# Altium PCB GatewayLoRa.PcbDoc
Units mm, origin at the board's own origin, x right, y up, seen from the top; angles counter-clockwise.
Board outline 89.69 x 57.94 mm, 2 copper layers (Top Layer, Bottom Layer); 77 components, 47 nets, 326 pads, 40 vias.
Unrouted connection lines stored in the file: 1.
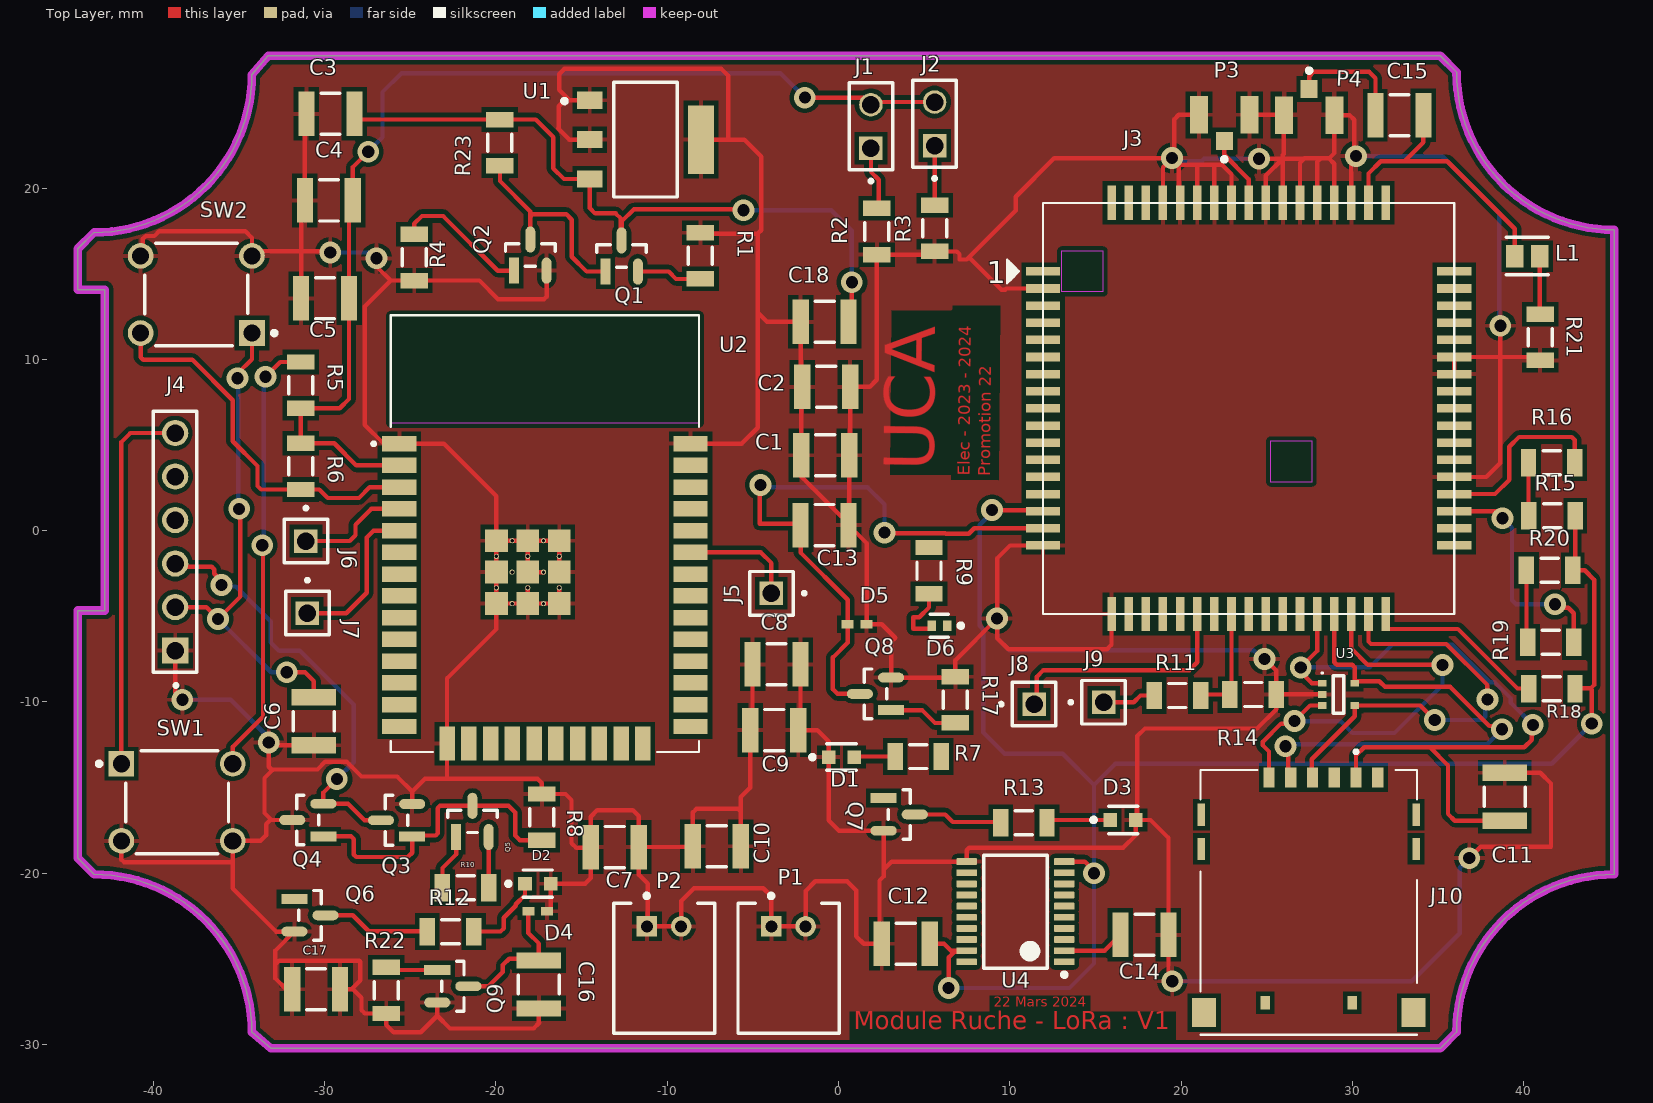
[diagram p0: Top Layer view]
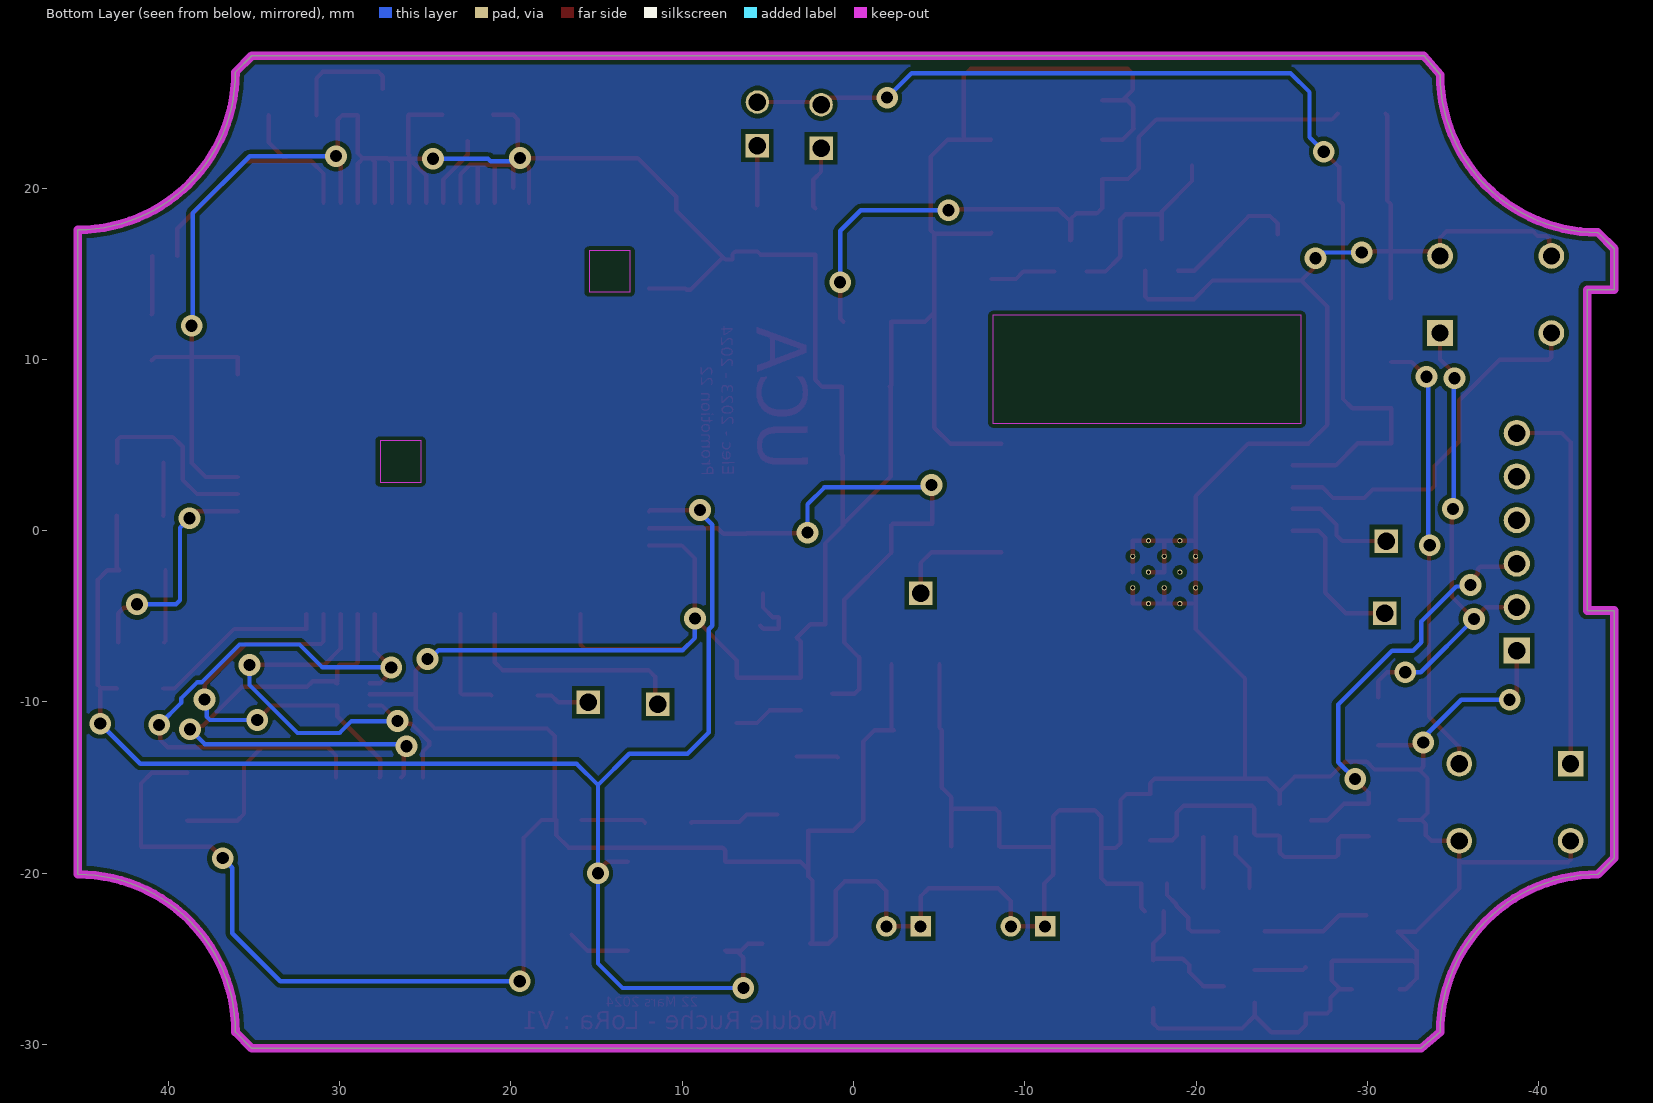
[diagram p1: Bottom Layer view, seen from below]

## Layer stack, top to bottom
Top Solder: solder mask 0.0102, Solder Resist, Dk 3.5
Top Layer: signal copper 0.0356
Dielectric 1: dielectric 0.32, FR-4, Dk 4.8
Bottom Layer: signal copper 0.0356
Bottom Solder: solder mask 0.0102, Solder Resist, Dk 3.5

## Board outline
-44.403,-19.107 -43.451,-20.06 cw(c-43.451,-29.267) -34.243,-29.267 -33.132,-30.22 35.131,-30.22 36.083,-29.267 cw(c45.291,-29.267) 45.291,-20.06 45.291,17.564 cw(c45.291,26.771) 36.083,26.771 35.131,27.724 -33.291,27.724 -34.243,26.613 cw(c-43.451,26.613) -43.451,17.405 -44.403,16.453 -44.403,14.071 -42.816,14.071 -42.816,-4.661 -44.403,-4.661

## Design rules (kind name [scope] priority, off if disabled: settings)
Clearance [All] p1: gap=0.254 ignorepadtopadclearanceinfootprint=FALSE except(0: Arc-Hole Track-Hole SMDPad-Hole THPad-Hole Via-Hole Fill-Hole Poly-Hole Region-Hole Text-Hole)
PolygonConnect [All] p1: connectstyle=Relief reliefconductorwidth=0.254 reliefentries=4 polygonreliefangle="90 Angle" airgapwidth=0.254
RoutingVias [All] p1: holewidth=0.711 width=1.27 viastyle="Through Hole" minholewidth=0.711 minwidth=1.27 maxholewidth=0.711 maxwidth=1.27
SolderMaskExpansion [All] p1: expansion=0.102 istentingtop=FALSE
Width [All] p1: maxlimit=0.254 minlimit=0.254 preferedwidth=0.254
30 further rules are at their usual default settings.

## Components (designator, comment, footprint, x,y, rotation, side; value= is the part's Value field where it differs from the comment)
C1 "100n" CAPC1210(3225)280_L -0.772,4.406 r0 top value=22uF
C2 "10u" CAPC1210(3225)280_L -0.716,8.394 r0 top value=22uF
C3 "10u" CAPC1210(3225)280_L -29.653,24.332 r0 top value=22uF
C4 "100n" CAPC1210(3225)280_L -29.742,19.276 r0 top value=22uF
C5 "10u" CAPC1210(3225)280_L -29.966,13.563 r0 top value=22uF
C6 "100n" CAPC1210(3225)280_L -30.618,-11.129 r90 top value=22uF
C7 "0.1uF" CAPC1210(3225)280_L -13.053,-18.468 r0 top value=22uF
C8 "1uF" CAPC1210(3225)280_L -3.613,-7.803 r0 top value=22uF
C9 "10uF" CAPC1210(3225)280_L -3.739,-11.64 r0 top value=22uF
C10 "100uF" CAPC1210(3225)280_L -7.095,-18.42 r0 top value=22uF
C11 "0.22uF" CAPC1210(3225)280_L 38.902,-15.528 r90 top value=22uF
C12 "0.1uF" CAPC1210(3225)280_L 3.929,-24.112 r0 top value=22uF
C13 "100uF" CAPC1210(3225)280_L -0.808,0.328 r0 top value=22uF
C14 "0.1uF" CAPC1210(3225)280_L 17.866,-23.593 r180 top value=22uF
C15 "33pF" CAPC1210(3225)280_L 32.751,24.258 r0 top value=22uF
C16 "100uF" CAPC1210(3225)280_L -17.484,-26.488 r270 top value=22uF
C17 "100n" CAPC1210(3225)280_L -30.489,-26.77 r0 top value=22uF
C18 "100n" CAPC1210(3225)280_L -0.804,12.191 r0 top value=22uF
D1 "LED_Green" FP-LTST-C191KGKT-MFG 0.182,-13.22 r0 top
D2 "LED_Bleue" FP-LTST-C193TBKT-5A-MFG -17.541,-20.608 r0 top
D3 "LED_Bleue" FP-LTST-C193TBKT-5A-MFG 16.616,-16.886 r0 top
D4 "PESD5V0X1UB" SOD523 -17.551,-22.218 r180 top
D5 "PESD5V0X1UB" SOD523 1.095,-5.461 r180 top
D6 "LED_Red" FP-SML-P11UTT86-MFG 5.894,-5.545 r180 top
J1 "TSW-102-24-L-S" SAMTEC_TSW-102-24-L-S 1.899,22.329 r90 top
J2 "TSW-102-24-L-S" SAMTEC_TSW-102-24-L-S 5.616,22.483 r90 top
J3 "SIM7000G" SIM7000G 23.946,7.137 r0 top
J4 "TSW-106-XX-X-S" SAMTEC_TSW-106-XX-X-S -38.714,-0.652 r90 top
J5 "TP1" SAMTEC_TSW-101-07-L-S -3.913,-3.655 r180 top
J6 "TP2" SAMTEC_TSW-101-07-L-S -31.083,-0.606 r270 top
J7 "TP3" SAMTEC_TSW-101-07-L-S -30.998,-4.815 r270 top
J8 "TP4" SAMTEC_TSW-101-07-L-S 11.423,-10.128 r0 top
J9 "TP5" SAMTEC_TSW-101-07-L-S 15.487,-10.014 r0 top
J10 "78646-3001" MOLEX_78646-3001 27.458,-21.701 r270 top
L1 "27nH" FP-LQM21PH_G0-IPC_C 40.212,16.031 r0 top
P1 "S2B-PH-K-S(LF)(SN)" JST-S2B-PH-K-S_V -2.91,-25.548 r0 top
P2 "S2B-PH-K-S(LF)(SN)" JST-S2B-PH-K-S_V -10.175,-25.548 r0 top
P3 "U.FL-R-SMT(01)" HRS-U.FL-R-SMT(10)_V 22.528,24.276 r90 top
P4 "U.FL-R-SMT(01)" HRS-U.FL-R-SMT(10)_V 27.48,24.258 r270 top
Q1 "BSS138" FP-318-08-IPC_B -12.657,16.036 r90 top
Q2 "BSS138" FP-318-08-IPC_B -17.983,16.088 r90 top
Q3 "BSS138" FP-318-08-IPC_B -25.791,-16.903 r180 top
Q4 "BSS138" FP-318-08-IPC_B -30.973,-16.891 r180 top
Q5 "BSS138" FP-318-08-IPC_B -21.365,-16.971 r90 top
Q6 "BSS138" FP-318-08-IPC_B -30.849,-22.453 r0 top
Q7 "BSS138" FP-318-08-IPC_B 3.548,-16.565 r0 top
Q8 "BSS138" FP-318-08-IPC_B 2.166,-9.526 r180 top
Q9 "BSS138" FP-318-08-IPC_B -22.508,-26.595 r0 top
R1 "33k" RESC3216X60X45LL10T20 -8.053,16.045 r270 top
R2 "1M" RESC3216X60X45LL10T20 2.245,17.465 r90 top
R3 "1M" RESC3216X60X45LL10T20 5.616,17.651 r90 top
R4 "100k" RESC3216X60X45LL10T20 -24.757,15.951 r90 top
R5 "100k" RESC3216X60X45LL10T20 -31.383,8.495 r270 top
R6 "10k" RESC3216X60X45LL10T20 -31.383,3.752 r90 top
R7 "100" RESC3216X60X45LL10T20 4.66,-13.185 r180 top
R8 "33k" RESC3216X60X45LL10T20 -17.308,-16.72 r270 top
R9 "150" RESC3216X60X45LL10T20 5.29,-2.334 r270 top
R10 "100k" RESC3216X60X45LL10T20 -21.764,-20.85 r180 top
R11 "NC" RESC3216X60X45LL10T20 19.791,-9.622 r0 top
R12 "470" RESC3216X60X45LL10T20 -22.643,-23.401 r0 top
R13 "470" RESC3216X60X45LL10T20 10.826,-17.041 r0 top
R14 "NC" RESC3216X60X45LL10T20 24.205,-9.565 r180 top
R15 "2.2k" RESC3216X60X45LL10T20 41.66,0.882 r0 top
R16 "NC" RESC3216X60X45LL10T20 41.633,3.965 r180 top
R17 "33k" RESC3216X60X45LL10T20 6.83,-9.873 r270 top
R18 "NC" RESC3216X60X45LL10T20 41.582,-6.511 r180 top
R19 "33k" RESC3216X60X45LL10T20 41.649,-9.216 r0 top
R20 "2.2k" RESC3216X60X45LL10T20 41.515,-2.312 r180 top
R21 "10" RESC3216X60X45LL10T20 40.962,11.292 r270 top
R22 "33k" RESC3216X60X45LL10T20 -26.393,-26.837 r90 top
R23 "33k" RESC3216X60X45LL10T20 -19.757,22.649 r270 top
SW1 "B3F-1000" OMRON-B3F-1000-4_V -38.605,-15.855 r0 top
SW2 "B3F-1000" OMRON-B3F-1000-4_V -37.482,13.786 r180 top
U1 "MIC5239-3.3YS-TR" FP-SOT223-3LD-PL-1-MFG -11.266,22.829 r0 top
U2 "ESP32-WROOM-32D" MODULE_ESP32-WROOM-32D -17.13,-0.179 r0 top
U3 "MSQA6V1W5T2G" ONSC-SC70-5-419A-02_V 29.196,-9.556 r0 top
U4 "TXB0108PWR" PW0020A_L 10.335,-22.243 r180 top

## Footprints (in the part's own frame and the unit in brackets; to place one, negate y for a bottom-side part, rotate by r counter-clockwise, add the part's x,y. Pads: shape width x height; smd on the part's side, far side on the other; paste and mask are expansions set on the pad)
CAPC1210(3225)280_L [mm] "Chip Capacitor, Body 3.2x2.5mm, Height 2.8mm, IPC High Density"
  rect 0.95x2.6 smd: 1(-1.4,0) 2(1.4,0)
  silkscreen extent -0.55,-1.2 0.55,1.2, body extent -1.7,-1.4 1.7,1.4, height 2.8
FP-318-08-IPC_B [mm]
  rect 1.524x0.578 smd paste+0 mask+0: 1(-0.91,0.95)
  rrect100% 1.524x0.578 smd paste+0 mask+0: 2(-0.91,-0.95) 3(0.91,0)
  silkscreen extent -0.65,-1.45 0.65,1.45, body extent -1.92,-1.7 1.92,1.7, height 0.25
FP-LQM21PH_G0-IPC_C [mm]
  rect 1.006x1.308 smd paste+0 mask+0: 1(-0.726,0) 2(0.726,0)
  silkscreen extent -1.23,-1.1 1.23,1.1, body extent -1.33,-0.8 1.33,0.8, height 0.25
FP-LTST-C191KGKT-MFG [mm]
  rect 0.8x0.8 smd paste+0 mask+0: 1(-0.75,0) 2(0.75,0)
  silkscreen extent -1.82,-0.77 0.85,0.77, body extent -1.25,-0.55 1.25,0.55, height 0.25
FP-LTST-C193TBKT-5A-MFG [mm]
  rect 0.8x0.8 smd paste+0 mask+0: 1(-0.75,0) 2(0.75,0)
  silkscreen extent -1.85,-0.8 0.85,0.8, body extent -1.25,-0.55 1.25,0.55, height 0.25
FP-SML-P11UTT86-MFG [mm]
  rect 0.5x0.6 smd paste+0 mask+0: 1(-0.45,0) 2(0.45,0)
  silkscreen extent -1.38,-0.67 0.53,0.67, body extent -0.8,-0.43 0.8,0.43, height 0.25
FP-SOT223-3LD-PL-1-MFG [mm]
  rect 1.5x1 smd paste+0 mask+0: 1(-3.25,2.3) 2(-3.25,0) 3(-3.25,-2.3)
  rect 1.5x4 smd paste+0 mask+0: 4(3.25,0)
  silkscreen extent -4.85,-3.35 1.85,3.35, body extent -4.1,-3.45 4.1,3.45, height 0.25
HRS-U.FL-R-SMT(10)_V [mm] "Connector, 3-Leads, Body 2.6x2.6mm"
  rect 1.05x1 smd: 1(-1.525,0)
  rect 2.2x1.05 smd: 2(0,-1.475) 3(0,1.475)
  silkscreen extent -2.72,-0.13 -2.48,0.12, body extent -1.3,-1.3 1.3,1.3, height 1.25
JST-S2B-PH-K-S_V [mm] "THD, 2-Leads, Body 7.6x5.9mm, Pitch 2mm"
  rect 1.2x1.2 hole 0.7: 1(-1,2.45)
  round 1.2 hole 0.7: 2(1,2.45)
  silkscreen extent -2.95,-3.8 2.95,4.35, body extent -2.95,-3.8 2.95,3.8, height 4.8
MODULE_ESP32-WROOM-32D [mm]
  rect 2x0.9 smd: 1(-8.5,5.26) 2(-8.5,3.99) 3(-8.5,2.72) 4(-8.5,1.45) 5(-8.5,0.18) 6(-8.5,-1.09) 7(-8.5,-2.36) 8(-8.5,-3.63) 9(-8.5,-4.9) 10(-8.5,-6.17) 11(-8.5,-7.44) 12(-8.5,-8.71) 13(-8.5,-9.98) 14(-8.5,-11.25) 25(8.5,-11.25) 26(8.5,-9.98) 27(8.5,-8.71) 28(8.5,-7.44) 29(8.5,-6.17) 30(8.5,-4.9) 31(8.5,-3.63) 32(8.5,-2.36) 33(8.5,-1.09) 34(8.5,0.18) 35(8.5,1.45) 36(8.5,2.72) 37(8.5,3.99) 38(8.5,5.26)
  rect 0.9x2 smd: 15(-5.715,-12.25) 16(-4.445,-12.25) 17(-3.175,-12.25) 18(-1.905,-12.25) 19(-0.635,-12.25) 20(0.635,-12.25) 21(1.905,-12.25) 22(3.175,-12.25) 23(4.445,-12.25) 24(5.715,-12.25)
  rect 1.33x1.33 smd: 39_1(-2.835,-0.405) 39_2(-1,-0.405) 39_3(0.835,-0.405) 39_4(-2.835,-2.24) 39_5(-1,-2.24) 39_6(0.835,-2.24) 39_7(-2.835,-4.075) 39_8(-1,-4.075) 39_9(0.835,-4.075)
  round 0.3 hole 0.2: 39_10(-1.917,-0.405) 39_11(-0.082,-0.405) 39_12(-2.835,-1.322) 39_13(-1,-1.322) 39_14(0.835,-1.322) 39_15(-1.917,-2.24) 39_16(-0.082,-2.24) 39_17(-2.835,-3.157) 39_18(-1,-3.157) 39_19(0.835,-3.157) 39_20(-1.917,-4.075) 39_21(-0.082,-4.075)
  Keep-Out Layer region: 9,6.45 -9,6.45 -9,12.75 9,12.75
  silkscreen extent -10.1,-12.75 9,12.75, body extent -9,-12.75 9,12.75, height 3.25
MOLEX_78646-3001 [mm]
  rect 1.15x0.65 smd: C1(-7.295,2.755) C2(-7.295,0.215) C3(-7.295,-2.325) C5(-7.295,4.025) C6(-7.295,1.485) C7(-7.295,-1.055)
  rect 1.3x0.45 smd: G1(-5.125,6.27) G2(-3.125,6.27) G3(-5.125,-6.27) G4(-3.125,-6.27)
  rect 1.7x1.4 smd: G5(6.435,-6.105) G6(6.435,6.105)
  rect 0.8x0.54 smd: X1(5.855,2.54) X2(5.855,-2.54)
  silkscreen extent -8.89,-6.32 7.73,6.32
OMRON-B3F-1000-4_V [mm] "TH, 4-Leads, Body 6x6mm"
  rect 1.5x1.5 hole 1 paste+0: 1(-3.25,2.25)
  round 1.5 hole 1 paste+0: 2(3.25,2.25) 4(3.25,-2.25)
  round 1.5 hole 1 paste+0 mask+0.102: 3(-3.25,-2.25)
  silkscreen extent -4.67,-3 3,3, body extent -3,-3 3,3, height 4.5
ONSC-SC70-5-419A-02_V [mm] "SOT23, 5-Leads, Body 2x1.25mm, Pitch 0.65mm"
  rect 0.5x0.4 smd: 1(-0.95,0.65) 2(-0.95,0) 3(-0.95,-0.65) 4(0.95,-0.65) 5(0.95,0.65)
  silkscreen extent -1,-1.1 0.3,1.3, body extent -0.63,-1 0.63,1, height 1.1
PW0020A_L [mm] "SOP, 20-Leads, Body 6.6x4.5mm, Pitch 0.65mm, IPC High Density"
  rrect25% 1.2x0.4 smd: 1(-2.85,2.925) 2(-2.85,2.275) 3(-2.85,1.625) 4(-2.85,0.975) 5(-2.85,0.325) 6(-2.85,-0.325) 7(-2.85,-0.975) 8(-2.85,-1.625) 9(-2.85,-2.275) 10(-2.85,-2.925) 11(2.85,-2.925) 12(2.85,-2.275) 13(2.85,-1.625) 14(2.85,-0.975) 15(2.85,-0.325) 16(2.85,0.325) 17(2.85,0.975) 18(2.85,1.625) 19(2.85,2.275) 20(2.85,2.925)
  silkscreen extent -2.98,-3.3 1.85,3.8, body extent -3.21,-3.25 3.21,3.25, height 1
RESC3216X60X45LL10T20 [mm] "Chip Resistor, 2-Leads, Body 3.20x1.60mm, IPC High Density"
  rect 0.9x1.6 smd: 1(-1.35,0) 2(1.35,0)
  silkscreen extent -0.5,-0.7 0.5,0.7, body extent -1.65,-0.85 1.65,0.85, height 0.6
SAMTEC_TSW-101-07-L-S [mm]
  rect 1.37x1.37 / inner round 1.37 / far side rect 1.37x1.37 hole 1.02: 01(0,0)
  silkscreen extent -2.02,-1.27 1.27,1.27
SAMTEC_TSW-102-24-L-S [mm]
  rect 1.37x1.37 hole 1.02: 01(0,0)
  round 1.37 hole 1.02: 02(2.54,0)
  silkscreen extent -2.02,-1.27 3.81,1.27
SAMTEC_TSW-106-XX-X-S [mm]
  rect 1.53x1.53 hole 1.02: 01(-6.35,0)
  round 1.53 hole 1.02: 02(-3.81,0) 03(-1.27,0) 04(1.27,0) 05(3.81,0) 06(6.35,0)
  silkscreen extent -8.48,-1.27 7.62,1.27
SIM7000G [mm]
  rect 2x0.5 smd: P$1(-12,8) P$2(-12,7) P$3(-12,6) P$4(-12,5) P$5(-12,4) P$6(-12,3) P$7(-12,2) P$8(-12,1) P$9(-12,0) P$10(-12,-1) P$11(-12,-2) P$12(-12,-3) P$13(-12,-4) P$14(-12,-5) P$15(-12,-6) P$16(-12,-7) P$17(-12,-8) P$35(12,-8) P$36(12,-7) P$37(12,-6) P$38(12,-5) P$39(12,-4) P$40(12,-3) P$41(12,-2) P$42(12,-1) P$43(12,0) P$44(12,1) P$45(12,2) P$46(12,3) P$47(12,4) P$48(12,5) P$49(12,6) P$50(12,7) P$51(12,8)
  rect 0.5x2 smd: P$18(-8,-12) P$19(-7,-12) P$20(-6,-12) P$21(-5,-12) P$22(-4,-12) P$23(-3,-12) P$24(-2,-12) P$25(-1,-12) P$26(0,-12) P$27(1,-12) P$28(2,-12) P$29(3,-12) P$30(4,-12) P$31(5,-12) P$32(6,-12) P$33(7,-12) P$34(8,-12) P$52(8,12) P$53(7,12) P$54(6,12) P$55(5,12) P$56(4,12) P$57(3,12) P$58(2,12) P$59(1,12) P$60(0,12) P$61(-1,12) P$62(-2,12) P$63(-3,12) P$64(-4,12) P$65(-5,12) P$66(-6,12) P$67(-7,12) P$68(-8,12)
  Keep-Out Layer region: -8.5,6.8 -10.9,6.8 -10.9,9.2 -8.5,9.2
  Keep-Out Layer region: 3.7,-4.3 1.3,-4.3 1.3,-1.9 3.7,-1.9
  silkscreen extent -14.1,-12 12,12
SOD523 [mm]
  rect 0.7x0.5 smd: 1(0.55,0) 2(-0.55,0)

## Part data
C1 C2 C3 C4 C5 C6 C7 C8 C9 C10 C11 C12 C13 C14 C15 C16 C17 C18: library part CMP-1038-02268-1, "CAP 22uF 10V ±10% 1210 (3225 Metric) Thickness 2.8mm SMD", Case-EIA=1210, Case-Metric=3225, Rated Voltage="10 V", Tolerance=Â±10%, Max Thickness="2.8 mm", Technology=SMT
D1: library part CMP-2000-05198-2, "LED GREEN CLEAR SMD", Case Code (Imperial)=0603, Case Code (Metric)=1608, Color=Green, Forward Current=30mA, Forward Voltage=2V, Lens Color=Colorless, Max Operating Temperature=85°C, Max Power Dissipation=75mW, Min Operating Temperature=-55°C, Package Quantity=1, Reverse Voltage=5V, Test Current=20mA, Case/Package=0603, Depth=0.8mm, Dominant Wavelength=571nm, Height=0.55mm, Illumination Color=Green, Lead Free="Lead Free", Length=1.6mm, Lens Style=Rectangular, Lens Transparency=Clear, Luminous Intensity=35mcd, Mount="Surface Mount", Number of Elements=1, Number of LEDs=1, Number of Pins=2, Packaging="Tape and Reel", Power Dissipation=75mW, Power Rating=75mW, Radiation Hardening=No, Viewing Angle=130°, Wavelength=574nm, Width=0.8mm
D2 D3: library part CMP-2000-06624-2, "LED BLUE CLEAR CHIP SMD", Case Code (Imperial)=0603, Case Code (Metric)=1608, Color=Blue, Forward Current=20mA, Forward Voltage=2.8V, Lens Color=Colorless, Max Operating Temperature=80°C, Min Operating Temperature=-20°C, Package Quantity=1, Power Dissipation=76mW, Reverse Voltage=5V, Test Current=5mA, Case/Package=0603, Depth=0.8mm, Dominant Wavelength=475nm, Height=0.35mm, Illumination Color=Blue, Lead Free="Lead Free", Length=1.6mm, Lens Style=Diffused, Lens Transparency=Clear, Luminous Intensity=15mcd, Mount="Surface Mount", Number of Elements=1, Number of LEDs=1, Number of Pins=2, Packaging="Tape and Reel", Radiation Hardening=No, RoHS Compliant=Yes, Viewing Angle=130°, Width=0.8mm
D4 D5: "8V _Typ_ Clamp 1.5A _8/20Âµs_ Ipp Tvs Diode Surface Mount SOD-523", Package="SOD-523 NXP Semiconductors", Availability=Unavailable, MF="NXP Semiconductors", MP=PESD5V0X1UB, Price=None, SnapEDA_Link=https://www.snapeda.com/parts/PESD5V0X1UB/NXP%20Semiconductors/view-part/4219816/?ref=snap
D6: library part CMP-08952-000028-1, "LED RED CLEAR 1006 SMD", Case Code (Imperial)=0402, Case Code (Metric)=1005, Color=Red, Forward Current=20mA, Forward Voltage=1.8V, Lens Color=Colorless, Max Operating Temperature=85°C, Min Operating Temperature=-40°C, Package Quantity=1, Test Current=1mA, Case/Package=0402, Dominant Wavelength=621nm, Height=0.25mm, Illumination Color=Red, Lead Free="Lead Free", Length=1mm, Lens Style=Square, Lens Transparency=Clear, Luminous Intensity=5.5mcd, Mount="Surface Mount", Number of LEDs=1, Number of Pins=2, Packaging="Tape and Reel", Radiation Hardening=No, REACH SVHC="No SVHC", RoHS Compliant=Yes, Series=PicoLED™, Viewing Angle=150°, Wavelength=621nm, Width=0.6mm
J1 J2: "Connector Header Through Hole 2 position 0.100 (2.54mm)", Package=None, Availability=Bad, MF=Samtec, MP=TSW-102-24-L-S, Price=None, SnapEDA_Link=https://www.snapeda.com/parts/TSW-102-24-L-S/Samtec%20Inc./view-part/930762/?ref=snap, Toby_UK-Purchase-URL=https://snapeda.com/shop?store=Toby+UK&id=930762
J3: "802.15.4 Cat-M, Cat-NB, EDGE, GPRS, LPWA Transceiver Module 850MHz, 900MHz, 1.8GHz, 1.9GHz Antenna Not Included Surface Mount", Package=None, Availability="In Stock", Check_prices=https://www.snapeda.com/parts/SIM7000G/SIMCom/view-part/?ref=eda, MF="SIMCom Wireless Solutions Limited", MP=SIM7000G, Price=None, Purchase-URL=https://pricing.snapeda.com/search?q=SIM7000G&ref=eda, SnapEDA_Link=https://www.snapeda.com/parts/SIM7000G/SIMCom/view-part/?ref=snap
J4: "TSW - Samtec 2.54mm Pin Header 10.92mm Overall Pin Length (07) - Fast Stock", Package=None, Availability=Unavailable, MF="Samtec Inc.", MP=TSW-106-XX-X-S, Price=None
J5 J6 J7 J8 J9: library part TSW-101-07-L-S, "<a href=\"https://pricing.snapeda.com/parts/TSW-101-07-L-S/Samtec/view-part?ref=eda\">Check availability</a>", Package=None, Availability=Unavailable, MF="Samtec Inc.", MP=TSW-101-07-L-S, Price=None
J10: "6 Position Card Connector Micro SIM Surface Mount, Right Angle Gold", Package=None, Availability="In Stock", Check_prices=https://www.snapeda.com/parts/78646-3001/Molex/view-part/?ref=eda, MF=Molex, MP=78646-3001, Price=None, SnapEDA_Link=https://www.snapeda.com/parts/78646-3001/Molex/view-part/?ref=snap
L1: library part CMP-06042-017027-1, "Multilayer Type Inductor for Power Lines, 0805 (2012), 1μH, 30%, 0.0825Ω, 1.3A", Case Code (Imperial)=0805, Case Code (Metric)=2012, Current Rating=1.3A, DC Resistance (DCR)=82.5mR, Inductance=1uH, Inductance Tolerance=30%, Max Operating Temperature=125°C, Min Operating Temperature=-55°C, Package Quantity=4000, Self Resonant Frequency=50MHz, Test Frequency=1MHz, Case/Package=0805, Core Material=Ferrite, DC Current=1.3A, Depth=1.4mm, Height=0.9mm, Height - Seated (Max)=0.039inch, Length=2mm, Max DC Current=1.3A, Military Standard=Not, Mount="Surface Mount", Packaging="Tape and Reel", REACH SVHC="No SVHC", RoHS Compliant=Yes, Series=LQM21PN_GR, Shielding=Shielded, Termination=SMD/SMT, Tolerance=30%, Weight=0.000194oz, Width=0.049inch
P1 P2: library part CMP-1755-00004-1, "Male Header, Pitch 2 mm, 1 x 2 Position, Height 4.8 mm, Tail Length 3.4 mm, -25 to 85 degC, RoHS, Bulk", Capacitance="10 uF", Case\Package=Radial, Max Operating Temperature="85 degC", Min Operating Temperature="-40 degC", Package Quantity=200, Tolerance=20%, Voltage Rating="50 V", ComponentLink1Description=Datasheet, ComponentLink1URL=http://www.jst-mfg.com/product/pdf/eng/ePH.pdf, DatasheetVersion=Dec-12, Diameter="5 mm", Height="11 mm", Lead Pitch="2 mm", Length="11 mm", Mount="Through Hole", PackageDescription="Male Header, Pitch 2 mm, 1 x 2 Position, Height 4.8 mm, Tail Length 3.4 mm", PackageReference=S2B-PH-K-S, Packaging=Bulk, Pins=2, Radiation Hardening=No, REACH SVHC="No SVHC", RoHSCompliant=true, Voltage Rating (DC)="50 V"
P3 P4: library part CMP-2000-05151-1, "CONN RECPT ULTRA-MINI COAX SMD", Centre Contact Resistance=25mohm, Contact Resistance=10mohm, Flammability Rating=UL94V-0, Frequency Max=6GHz, Insulation Resistance=500Mohm, Manufacturer="Hirose Electric", Operating Temperature Max=90degC, Operating Temperature Min=-40degC, Package Description="3-Pin Surface Mount Device, Body 2.6 x 2.6 mm", Package Reference=U.FL-R-SMT(10), Voltage Rating V AC=60V, Approval Category=UL94V-0, Body Plating=Silver, Body Style=StraightJack, Coaxial Termination=Solder, Connector Mounting=PCB, Connector Mounting Orientation=PCBoard, Connector Type=UFLCoaxial, Contact Material=PhosphorBronze, Contact Plating=Gold, Datasheet URL=http://www.farnell.com/datasheets/91524.pdf, Datasheet Version=Feb-04, External Length / Height=2.5mm, Female Contact Material=PhosphorBronze, Female Contact Plating=Gold, Impedance=50ohm, Jacket Material=LCP, Male Contact Material=Brass, Male Contact Plating=Gold, Manufacturer URL=https://www.hirose.com, Material=PhosphorBronze, Mounting Type=PCBoard, Operating Frequency Max=6GHz, Outer Contact Resistance=10mohm, Secondary Insulation Material=PBT, SVHC=NoSVHC(18-Jun-2012), Termination Method=Solder, VSWR=1.3
Q1 Q2 Q3 Q4 Q5 Q6 Q7 Q8 Q9: library part CMP-07173-000101-1, "MOSFET N-CH 50V 220MA SOT-23", Case/Package=SOT-23, Continuous Drain Current (ID)=220mA, Drain to Source Breakdown Voltage=50V, Drain to Source Resistance=3.5R, Gate to Source Voltage (Vgs)=20V, Input Capacitance=27pF, Max Operating Temperature=150°C, Max Power Dissipation=360mW, Min Operating Temperature=-55°C, On-State Resistance=6R, Package Quantity=1, Threshold Voltage=1.3V, Contact Plating=Tin, Current Rating=220mA, Drain to Source Voltage (Vdss)=50V, Dual Supply Voltage=50V, Element Configuration=Single, Fall Time=9ns, Height=0.93mm, Lead Free="Lead Free", Length=2.92mm, Mount="Surface Mount", Nominal Vgs=1.3V, Number of Elements=1, Number of Pins=3, Packaging="Tape and Reel", Power Dissipation=360mW, Radiation Hardening=No, Rds On Max=3.5R, REACH SVHC="No SVHC", Rise Time=9ns, Termination=SMD/SMT, Turn-Off Delay Time=20ns, Turn-On Delay Time=2.5ns, Voltage Rating (DC)=50V, Weight=0.03g, Width=1.3mm
R1 R2 R3 R4 R5 R6 R7 R8 R9 R10 R11 R12 R13 R14 R15 R16 R17 R18 R19 R20 R21 R22 R23: library part CMP-2003-02263-1, Manufacturer="Vishay Dale", Part Number=CRCW120651R0FKEA
SW1 SW2: library part CMP-1677-00002-1, "Tactile Switch, SPST-NO, 0.05 A, 5 to 24 V, -25 to 70 degC, 4-Pin THD, RoHS, Bulk", Capacitance="-45 f", Current Rating="1.5 A", Max Operating Temperature="70 degC", Min Operating Temperature="-40 degC", Package Quantity=1080, Voltage Rating="150 V", ComponentLink1Description="Manufacturer URL", ComponentLink1URL=http://www.omron.com/, ComponentLink2Description=Datasheet, ComponentLink2URL=http://www.omron.com/ecb/products/pdf/en-b3f.pdf, Contact Material=Brass, Contact Plating=Gold, DatasheetVersion=Jan-15, Gender=Female, Height="14.99 mm", Lead Pitch="1.27 mm", Length="18.34 mm", Mount="Through Hole", PackageDescription="4-Pin Through Hole Device, Body 6 x 6 mm", PackageReference=B3F-1000, Packaging=Tray, Pins=8, Radiation Hardening=No, RoHSCompliant=true, Shielding=Shielded, Width="25.4 mm"
U1: library part CMP-06324-000012-1, "IC REG LINEAR 3.3V 500MA SOT223", Dropout Voltage=350mV, Manufacturer=Microchip, Max Junction Temp=+125°C, Max Supply Voltage=30V, Nominal Supply Current=23-8500uA, Output Current=500mA, Output Voltage=3.3V, Package=SOT223-3LD-PL-1, Temperature="-40°C to +125°C", Temperature Range Low=-40°C, Accuracy Percentage=1%, Automotive=No, Category=IC, ComponentLink2Description=Datasheet, ComponentLink2URL=http://ww1.microchip.com/downloads/en/DeviceDoc/mic5239.pdf, Device Class L1="Integrated Circuits (ICs)", Device Class L2="Power Management ICs", Device Class L3="Voltage Regulators - Linear", Digikey Description="IC REG LINEAR 3.3V 500MA SOT223", Footprint Url=https://ww1.microchip.com/downloads/en/PackagingSpec/00000049CE.pdf, Height=1.8mm, Ipc Land Pattern Name=SOT230P700X180-4, Lead Free=Yes, Manufacturer Part Number=MIC5239-3.3YS-TR, Mouser Description="LDO Voltage Regulators High Vin, Low Iq Regulator (Lead Free)", Number Of Outputs=1, Octopart=https://octopart.com/mic5239-3.3ys-tr-microchip-66802369, Output Type=Fixed, RoHS=TRUE, Standoff Height=0.02mm, Temperature Range High=+125°C
U2: "Bluetooth, WiFi 802.11b/g/n, Bluetooth v4.2 +EDR, Class 1, 2 and 3 Transceiver Module 2.4GHz ~ 2.5GHz Integrated", Package="Module Espressif Systems", Availability="In Stock", Check_prices=https://www.snapeda.com/parts/ESP32-WROOM-32D/Espressif+Systems/view-part/?ref=eda, MF="Espressif Systems", MP=ESP32-WROOM-32D, Price=None, Purchase-URL=https://pricing.snapeda.com/search/part/ESP32-WROOM-32D/?ref=eda, SnapEDA_Link=https://www.snapeda.com/parts/ESP32-WROOM-32D/Espressif+Systems/view-part/?ref=snap
U3: library part CMP-1063-00034-1, "Quad Array ESD Protection Diodes with Low Clamping Voltage, 5-Pin SC70, Pb-Free, Tape and Reel", Manufacturer="On Semiconductor", C Max (pF)=90, ComponentLink1Description="Manufacturer URL", ComponentLink1URL=http://www.onsemi.com/, ComponentLink2Description=Datasheet, ComponentLink2URL=http://www.onsemi.cn/pub_link/Collateral/MSQA6V1W5T2-D.PDF, ComponentLink3Description="Package Specification", ComponentLink3URL=http://www.onsemi.cn/pub_link/Collateral/419A-02.PDF, DatasheetVersion="Rev. 7", Direction=Unidirectional, IR Max (uA)=1, Mounting Technology="Surface Mount", Number of Lines=4, PackageDescription="5-Pin Small Outline Transistor, Body 2 x 1.25 mm, Pitch 0.65 mm", PackageReference=SC70-5-419A-02, PackageVersion="Rev. L, 01/2013", Packing="Tape and Reel", PartNumber=MSQA6V1W5T2G, PPK Max (W)=150, RoHS=Pb-Free, V(BR) Min (V)=6.1
U4: library part CMP-2000-07337-1, "TXB0108 8-Bit Bidirectional Voltage-Level Translator with Auto-Direction Sensing and / +/- 15-kV ESD Protection, 1.2 to 3.6 V, -40 to 85 degC, 20-Pin TSSOP (PW), Green (RoHS & no Sb/Br), Tape and Reel", Manufacturer="Texas Instruments", Operating Temperature=-40°C~85°C, Package / Case="20-TSSOP(0.173\",4.40mmWidth)", Package Description="20-Pin Small Outline Package Integrated Circuit, Body 6.5 x 4.4 mm, Pitch 0.65 mm", Package Reference=PW20, Package Version="4040064-5/G, 02/2011", Standard Package=1, Supplier Device Package=20-TSSOP, Voltage - Supply=1.2V~3.6V,1.65V~5.5V, Category=IntegratedCircuits(ICs), Data Rate=100Mbps, Datasheet URL=http://www.ti.com/general/docs/lit/getliterature.tsp?genericPartNumber=TXB0108&fileType=pdf, Datasheet Version="Rev. F, 12/2014", Differential - Input=Output:No/No, Dynamic Catalog=TXBSeries, Family=Logic-Translators, Input Type=Logic, Logic Function=Translator,Bidirectional, Manufacturer URL=http://www.ti.com/, Mounting Technology=SurfaceMount, Number of Bits=8, Number of Channels=8, Number of Outputs/Channel=1, Other Names=296-21527-6, Output Type=Logic, Package URL=http://www.ti.com/litv/pdf/mpds362, Packaging=Digi-Reel®, Product Training Modules=VoltageLevelTranslation, Propagation Delay (Max)=4ns, Series=-

## Via types
v1: diameter 1.27, hole 0.711, Top Layer to Bottom Layer, 40 vias

## Nets (pads, with @x,y where several pads share a name; then routed paths per layer and width w, separated by ;. In a path a pad name is that pad's centre, name@x,y a point inside that pad or via, vN(x,y) a via of type N, cw(c..) or ccw(c..) an arc to the next point about the centre after c; other vN are vias at no path point)
+1V8: C12.2 J3.P$15 R15.2 R19.2 R20.1 U4.10 U4.19 | length 96.3
  Top Layer w0.254: C12.2 6.165,-24.112 6.571,-24.518 U4.19 7.416,-24.587 6.757,-24.587 6.436,-24.908 v1(6.436,-26.698) ; v1(8.967,1.201) 11.882,1.201 J3.P$15 ; U4.10 14.376,-19.318 v1@14.783,-19.725 ; R15.2 43.01,-2.168 R20.1 43.564,-2.312 44.114,-2.862 44.114,-9.01 43.907,-9.216 43.901,-9.216 ; v1(43.982,-11.265) 43.982,-9.298 43.901,-9.216 ; 43.901,-9.216 43.892,-9.207 43.008,-9.207 R19.2 43.901,-9.216
  Bottom Layer w0.254: v1(6.436,-26.698) 13.493,-26.698 14.921,-25.27 v1(14.921,-20) 14.921,-14.85 ; v1(8.967,1.201) 8.967,1.061 8.25,0.343 8.25,-5.55 8.451,-5.751 8.451,-7.973 8.451,-11.781 9.695,-13.026 13.097,-13.026 14.921,-14.85 ; v1(43.982,-11.265) 41.648,-13.6 16.171,-13.6 14.921,-14.85
+3V3: C4.2 C5.2 J1.02 J2.02 R5.2 R6.2 U2.2 | length 63.6
  Top Layer w0.254: v1(-27.45,22.121) -28.342,21.23 C4.2 -28.566,19.051 C5.2 -28.566,7.687 -29.109,7.145 R5.2 R6.2 -29.435,5.102 -28.144,3.811 U2.2 ; v1(-1.958,25.279) 1.489,25.279 J1.02 2.053,25.023 J2.02
  Bottom Layer w0.254: v1(-27.45,22.121) -26.609,22.963 -26.609,25.603 -25.503,26.709 -3.388,26.709 v1(-1.958,25.279)
+5V: C14.2 U4.2 | length 3.7
  Top Layer w0.254: U4.2 15.54,-24.518 C14.2
GND: C1.1 C1.2 C2.1 C2.2 C3.1 C4.1 C5.1 C6.1 C7.1 C7.2 C8.1 C8.2 C9.1 C9.2 C10.1 C10.2 C11.2 C12.1 C13.2 C14.1 C16.2 C17.1 C17.2 C18.1 D1.1 D2.2 D3.2 D4.2 D5.2 J3.P$2 J3.P$17 J3.P$18 J3.P$39 J3.P$45 J3.P$46 J3.P$54 J3.P$55 J3.P$56 J3.P$57 J3.P$58 J3.P$59 J3.P$61 J3.P$62 J3.P$63 J3.P$64 J3.P$65 J4.01 P1.1 P1.2 P2.1 P2.2 P3.2 P3.3 P4.2 P4.3 Q2.2 Q3.2 Q4.3 Q6.2 Q7.2 Q8.2 Q9.2 R1.1 R2.1 R3.1 R4.1 R8.1 R14.1 R17.1 R21.2 R22.1 SW1.3 SW1.4 SW2.3 SW2.4 U1.1 U1.2 U1.4 U2.1 U2.15 U2.38 U2.39_1 U2.39_2 U2.39_3 U2.39_4 U2.39_5 U2.39_6 U2.39_7 U2.39_8 U2.39_9 U2.39_10 U2.39_11 U2.39_12 U2.39_13 U2.39_14 U2.39_15 U2.39_16 U2.39_17 U2.39_18 U2.39_19 U2.39_20 U2.39_21 U3.2 U4.11 | length 586.6
  Top Layer w0.254: SW1.3 -41.855,-19.2 -41.706,-19.349 -35.355,-19.349 ; SW2.4 -40.6,16.168 -40.6,17.037 -40.44,17.198 -39.929,17.198 -39.641,17.486 -34.626,17.486 -34.232,17.093 SW2.3 -33.961,16.307 -31.366,16.307 ; J4.01 -38.714,-9.451 v1(-38.297,-9.867) ; -33.049,-13.99 -33.257,-13.782 v1(-33.257,-12.36) -33.088,-12.529 C6.1 ; C17.1 -32.234,-26.77 -32.864,-26.14 -32.864,-25.324 ; Q4.3 -33.091,-16.891 ; C5.1 -31.366,16.307 ; C3.1 -31.142,24.242 C4.1 -31.366,19.051 -31.366,16.307 ; v1(-29.661,16.236) -29.732,16.307 -31.366,16.307 ; C17.2 -28.429,-26.77 ; v1(-26.959,15.898) -26.959,15.425 -26.135,14.601 ; Q3.2 -24.881,-15.228 ; Q9.2 -23.418,-28.313 ; U2.39_18 U2.39_8 ; C16.2 -17.484,-28.708 -17.462,-28.73 -17.793,-29.061 -22.67,-29.061 -23.418,-28.313 ; U2.39_16 U2.39_5 U2.39_13 U2.39_2 ; Q2.2 -17.033,13.663 -17.182,13.514 -19.869,13.514 -20.956,14.601 R4.1 -26.135,14.601 ; D4.2 -16.791,-22.008 D2.2 -14.788,-20.608 -14.453,-20.273 C7.1 ; U2.39_19 U2.39_9 U2.39_21 U2.39_8 ; U2.39_6 U2.39_14 U2.39_3 U2.39_11 U2.39_2 ; U1.2 -15.708,22.829 -16.365,23.486 -16.322,23.528 -16.322,24.781 -15.975,25.129 -15.69,25.129 ; U1.1 -15.69,25.129 ; U2.38 -5.638,5.081 -4.705,6.014 -4.705,12.732 ; R1.1 -7.999,17.342 -4.705,17.342 ; U1.4 -6.421,22.829 ; C10.2 -5.695,-16.384 ; C8.1 -5.013,-11.514 C9.1 -5.139,-14.999 -5.695,-15.554 -5.695,-16.384 ; C8.2 -2.213,-11.514 C9.2 -2.213,-11.64 -1.24,-11.64 -0.568,-12.312 D1.1 -0.568,-16.911 0.035,-17.515 Q7.2 2.638,-19.797 ; J3.P$17 10.022,-0.863 9.266,-1.619 v1(9.266,-5.129) ; J3.P$2 9.799,14.137 9.731,14.068 9.52,14.068 7.625,15.964 ; J3.P$18 15.946,-6.649 15.663,-6.932 9.938,-6.932 9.266,-6.259 v1(9.266,-5.129) ; J3.P$65 18.946,21.22 v1(19.476,21.75) ; v1(19.491,-26.304) 19.266,-26.078 C14.1 19.266,-17.934 18.218,-16.886 D3.2 ; J3.P$64@19.862,20.01 19.862,21.357 20.865,21.357 ; J3.P$63 20.946,21.276 20.865,21.357 ; P3.3 19.873,24.276 19.605,24.008 19.605,21.879 v1(19.476,21.75) ; J3.P$62 21.946,21.279 21.869,21.357 ; J3.P$61 22.946,20.802 22.391,21.357 21.869,21.357 ; P3.2 25.986,24.276 P4.2 26.005,21.986 25.946,21.928 25.946,21.714 ; v1(24.549,21.714) 25.934,21.714 ; v1(24.878,-7.484) 25.555,-8.161 R14.1 ; J3.P$59 24.946,20.726 25.934,21.714 ; J3.P$58 25.946,21.714 ; J3.P$57 26.946,21.473 27.187,21.714 ; J3.P$56 27.946,21.527 28.152,21.732 ; U3.2 25.564,-9.556 R14.1 ; J3.P$55 28.946,21.426 28.64,21.732 ; J3.P$54 29.946,21.59 v1(30.219,21.863) 30.113,21.969 30.113,23.984 29.839,24.258 P4.3 28.955,22.048 28.64,21.732 ; J3.P$39 37.825,3.137 38.641,3.954 38.641,10.137 ; J3.P$45 J3.P$46 38.538,10.137 ; v1(36.83,-19.117) 37.495,-18.452 41.595,-18.452 41.595,-14.756 40.967,-14.128 C11.2 ; v1(38.641,11.96) 38.641,10.241 38.538,10.137 ; R21.2 40.767,10.137 38.641,10.137 ; -35.355,-19.349 -35.355,-20.88 -32.832,-23.403 Q6.2 -32.864,-24.507 -32.864,-25.324 ; -35.355,-19.349 SW1.4 -33.737,-18.105 -33.405,-17.773 -33.405,-17.128 -33.168,-16.891 -33.091,-16.891 ; -33.091,-16.891 -33.502,-16.48 -33.502,-14.442 -33.001,-13.941 -30.411,-13.941 -29.952,-13.482 -28.707,-13.482 -27.84,-14.35 -25.759,-14.35 -24.881,-15.228 ; -32.864,-25.324 -32.649,-25.108 -27.96,-25.108 -27.904,-25.165 -27.904,-26.244 -28.429,-26.77 ; -28.429,-26.77 -28.336,-26.77 -27.839,-27.267 -27.839,-27.989 -27.641,-28.187 R22.1 -26.393,-28.849 -25.966,-29.276 -24.38,-29.276 -23.418,-28.313 ; -26.135,14.601 -27.646,13.09 -27.646,6.176 -26.55,5.081 U2.1 -23.036,5.081 -19.965,2.01 U2.39_1 ; -24.881,-15.228 -24.133,-14.48 -22.87,-14.48 ; -22.87,-14.48 -17.567,-14.48 -17.308,-14.739 R8.1 -15.934,-15.37 -15.576,-15.728 -15.576,-18.245 -15.295,-18.526 -14.511,-18.526 C7.1 ; -22.87,-14.48 -22.845,-14.455 U2.15 -22.845,-8.621 -19.965,-5.741 U2.39_7 ; U2.39_7 U2.39_20 U2.39_8 ; U2.39_7 U2.39_17 U2.39_4 U2.39_12 U2.39_1 ; U2.39_1 U2.39_10 U2.39_2 ; -15.69,25.129 -16.305,25.745 -16.305,26.651 -15.999,26.957 -6.83,26.957 -6.421,26.548 -6.421,22.829 ; C7.1 -14.453,-16.694 -14.072,-16.313 -12.004,-16.313 -11.653,-16.663 C7.2 ; C7.2 -8.543,-18.468 C10.1 -8.495,-16.444 -8.286,-16.235 -5.843,-16.235 -5.695,-16.384 ; C7.2 -11.653,-20.078 -11.12,-20.611 -11.12,-23.043 P2.1 P2.2 -9.175,-21.62 -8.425,-20.87 -4.388,-20.87 -3.91,-21.348 P1.1 P1.2 -1.91,-21.03 -1.349,-20.469 0.507,-20.469 1.046,-21.008 1.046,-23.684 1.475,-24.112 C12.1 2.399,-23.982 2.399,-20.427 2.638,-20.188 2.638,-19.797 ; -6.421,22.829 -5.499,22.829 -4.508,21.838 -4.508,17.539 -4.705,17.342 ; -4.705,12.732 -4.164,12.191 C18.1 -2.204,8.482 C2.1 -2.172,8.338 C1.1 -2.172,3.164 C13.2@0.628,0.364 ; -4.705,12.732 -4.705,17.342 ; C13.2@0.628,0.364 C13.2 1.645,-0.724 D5.2 2.535,-5.461 3.318,-6.244 3.076,-6.487 Q8.2 6.778,-8.576 R17.1 6.83,-7.565 v1(9.266,-5.129) ; C13.2@0.628,0.364 C1.2 0.684,4.462 C2.2 1.83,8.394 2.245,8.809 R2.1 5.43,16.115 R3.1 6.914,16.301 7.069,16.146 7.069,15.832 7.492,15.832 7.625,15.964 ; 2.638,-19.797 3.117,-19.318 U4.11 7.485,-18.661 7.634,-18.512 16.621,-18.512 17.366,-17.767 D3.2 ; 7.625,15.964 10.348,18.687 10.348,19.499 12.599,21.75 v1(19.476,21.75) ; D3.2 17.45,-16.803 17.45,-11.989 17.894,-11.545 24.444,-11.545 25.555,-10.434 R14.1 ; 20.865,21.357 21.869,21.357 ; 25.934,21.714 25.946,21.714 ; 25.946,21.714 27.187,21.714 ; 27.187,21.714 27.205,21.732 28.152,21.732 ; 28.152,21.732 28.64,21.732 ; 38.538,10.137 38.641,10.137
  Bottom Layer w0.254: v1(-38.297,-9.867) -35.475,-9.867 -33.257,-12.085 v1(-33.257,-12.36) ; v1(-29.661,16.236) -27.297,16.236 v1(-26.959,15.898) ; v1(9.266,-5.129) 9.266,-6.259 9.978,-6.971 24.221,-6.971 24.733,-7.484 v1(24.878,-7.484) ; v1(19.476,21.75) 19.67,21.555 21.185,21.555 21.344,21.714 v1(24.549,21.714) ; v1(19.491,-26.304) 33.467,-26.304 36.276,-23.494 36.276,-19.671 v1(36.83,-19.117) ; v1(30.219,21.863) 35.253,21.863 38.576,18.54 38.576,12.026 v1(38.641,11.96)
I2C_SCL: J3.P$38 R16.1 | length 11
  Top Layer w0.254: J3.P$38 38.334,2.137 39.161,2.964 39.161,4.895 39.737,5.471 42.809,5.471 42.983,5.298 R16.1
I2C_SDA: J3.P$37 R18.1 | length 13.6
  Top Layer w0.254: J3.P$37 38.357,1.137 v1(38.773,0.722) ; v1(41.827,-4.299) 42.021,-4.493 42.609,-4.493 42.932,-4.816 R18.1
  Bottom Layer w0.254: v1(38.773,0.722) 39.324,0.17 39.324,-4.065 39.558,-4.299 v1(41.827,-4.299)
LTE_SCL: R18.2 R20.2 | length 4.2
  Top Layer w0.254: 40.165,-4.099 40.165,-6.444 R18.2 ; 40.165,-4.099 R20.2
LTE_SDA: R15.1 R16.2 | length 3.1
  Top Layer w0.254: R16.2 40.283,0.908 R15.1
MEASURE: Q2.1 R4.2 | length 8
  Top Layer w0.254: R4.2 -24.757,17.925 -24.31,18.372 -23.076,18.372 -19.883,15.178 Q2.1
NetC3_2: C3.2 C18.2 Q1.3 R23.1 U1.3 | length 42.2
  Top Layer w0.254: C3.2 -27.92,23.999 R23.1 -17.665,23.999 -16.641,22.976 -16.641,21.149 -16.021,20.529 U1.3 -14.516,18.838 -14.201,18.523 -13.004,18.523 -12.697,18.216 -12.697,16.987 Q1.3 -12.657,18.041 -11.929,18.769 -5.602,18.769 v1(-5.541,18.707) ; C18.2 0.785,12.38 v1(0.785,14.5)
  Bottom Layer w0.254: v1(-5.541,18.707) -0.412,18.707 0.785,17.509 v1(0.785,14.5)
NetC6_2: C6.2 J4.02 SW2.1 | length 28.9
  Top Layer w0.254: J4.02 -36.908,-4.462 v1(-36.222,-5.149) -34.91,-3.837 -34.91,1.202 v1(-34.981,1.273) ; v1(-35.076,8.893) -35.076,9.168 -34.232,10.012 SW2.1 ; v1@-31.911,-8.557 v1(-32.206,-8.261) -31.141,-8.261 -30.618,-8.785 C6.2
  Bottom Layer w0.254: v1(-36.222,-5.149) -33.109,-8.261 v1(-32.206,-8.261) ; v1(-35.076,8.893) -35.029,8.846 -35.029,1.32 v1(-34.981,1.273)
NetC11_1: C11.1 J3.P$30 J10.C1 U3.1 | length 42.1
  Top Layer w0.254: J3.P$30 27.946,-7.023 v1(26.99,-7.98) 26.99,-8.255 27.641,-8.906 U3.1 ; J10.C1 30.213,-13.126 30.693,-12.646 34.53,-12.646 ; C11.1 35.981,-16.928 35.585,-16.532 35.585,-13.702 34.53,-12.646 ; v1(40.539,-11.335) 40.483,-11.391 40.483,-12.202 40.039,-12.646 34.53,-12.646
  Bottom Layer w0.254: v1(26.99,-7.98) 31.011,-7.98 32.342,-6.649 35.852,-6.649 38.044,-8.84 38.306,-8.84 39.257,-9.79 39.257,-10.053 v1(40.539,-11.335)
NetC15_1: C15.1 P4.1 | length 7
  Top Layer w0.254: P4.1 27.48,26.532 27.73,26.782 30.985,26.782 31.351,26.416 C15.1
NetD1_2: D1.2 R7.2 | length 2.4
  Top Layer w0.254: D1.2 0.967,-13.185 R7.2
NetD2_1: D2.1 R12.2 | length 5
  Top Layer w0.254: R12.2 -19.725,-23.401 -19.54,-23.217 -19.54,-22.6 -18.832,-21.892 -18.832,-21.81 -18.291,-21.269 D2.1
NetD3_1: D3.1 R13.2 | length 3.8
  Top Layer w0.254: R13.2 12.331,-16.886 D3.1
NetD6_2: D6.2 R9.2 | length 3.8
  Top Layer w0.254: 4.369,-5.056 4.369,-5.721 5.268,-5.721 D6.2 ; 4.37,-5.055 4.714,-5.055 5.29,-4.48 R9.2
NetJ3_P$23: J3.P$23 J8.01 | length 14.2
  Top Layer w0.254: J8.01 11.574,-9.977 11.574,-8.536 11.969,-8.141 20.492,-8.141 20.946,-7.687 J3.P$23
NetJ3_P$25: J3.P$25 R11.2 R14.2 | length 6.5
  Top Layer w0.254: R11.2 21.198,-9.565 R14.2 22.946,-9.474 J3.P$25
NetJ3_P$31: J3.P$31 J10.C7 U3.5 | length 29.8
  Top Layer w0.254: v1(26.102,-12.584) 26.252,-12.734 26.252,-14.255 J10.C7 ; J3.P$31 28.946,-7.683 29.095,-7.831 29.997,-7.831 30.146,-7.98 U3.5@30.146,-8.783 ; U3.5 30.196,-8.906 30.232,-8.87 30.269,-8.833 30.269,-8.783 31.575,-8.783 31.907,-9.116 35.708,-9.116 37.998,-11.405 38.552,-11.405 v1(38.74,-11.593)
  Bottom Layer w0.254: v1(26.102,-12.584) 26.221,-12.465 37.868,-12.465 v1(38.74,-11.593)
NetJ3_P$32: J3.P$32 J10.C3 U3.3 | length 25.6
  Top Layer w0.254: J10.C3 25.133,-12.888 24.78,-12.535 24.78,-12.324 25.842,-11.262 26.48,-11.262 27.536,-10.206 U3.3 ; J3.P$32 29.946,-6.878 30.904,-7.836 v1(35.269,-7.836)
  Bottom Layer w0.254: v1(26.625,-11.117) 29.312,-11.117 30.003,-11.808 32.466,-11.808 35.269,-9.005 v1(35.269,-7.836)
NetJ3_P$33: J3.P$33 J10.C2 U3.4 | length 24.8
  Top Layer w0.254: J10.C2 27.636,-14.369 27.636,-13.345 30.146,-10.836 U3.4 33.963,-10.206 v1(34.811,-11.054) ; J3.P$33 30.946,-6.467 31.095,-6.616 35.486,-6.616 37.885,-9.016 v1(37.885,-9.856)
  Bottom Layer w0.254: v1(34.811,-11.054) 37.57,-11.054 37.752,-10.872 37.752,-9.989 v1(37.885,-9.856)
NetJ4_06: J4.06 SW1.1 | length 22.1
  Top Layer w0.254: SW1.1 -41.855,5.174 -41.332,5.698 J4.06
NetJ5_01: J5.01 U2.33 | length 6.7
  Top Layer w0.254: U2.33 -4.535,-1.269 -3.913,-1.892 J5.01
NetJ9_01: J9.01 R11.1 | length 3.1
  Top Layer w0.254: J9.01 17.243,-10.014 17.636,-9.622 R11.1
NetL1_2: L1.2 R21.1 | length 3.4
  Top Layer w0.254: L1.2 40.938,12.666 R21.1
NetQ1_1: Q1.1 Q2.3 R23.2 | length 12.1
  Top Layer w0.254: R23.2 -19.757,20.411 -17.983,18.636 -17.983,18.328 ; Q2.3 -17.983,18.328 ; Q1.1 -14.699,15.126 -15.563,15.989 -15.563,18.151 -15.89,18.479 -17.832,18.479 -17.983,18.328
NetQ3_1: Q3.1 Q4.1 Q5.3 R8.2 | length 18.1
  Top Layer w0.254: Q4.1 -28.451,-17.841 -28.284,-18.008 -28.284,-18.915 -28.151,-19.048 -25.134,-19.048 -24.881,-18.795 Q3.1 -24.822,-17.794 -23.514,-17.794 -23.391,-17.672 -23.391,-16.194 -23.258,-16.06 Q5.3 -19.26,-16.06 -18.866,-16.454 -18.866,-17.797 -18.593,-18.07 R8.2
NetQ5_2: Q5.2 R10.1 | length 3
  Top Layer w0.254: Q5.2 -20.415,-20.848 R10.1
NetQ6_3: Q6.3 R12.1 | length 6.3
  Top Layer w0.254: Q6.3 -28.355,-22.453 -27.421,-23.387 -24.008,-23.387 R12.1
NetQ7_3: Q7.3 R13.1 | length 5.2
  Top Layer w0.254: Q7.3 6.242,-16.565 6.682,-17.004 9.439,-17.004 R13.1
NetR5_1: R5.1 SW1.2 | length 25.8
  Top Layer w0.254: SW1.2 -35.355,-12.622 -33.592,-10.859 -33.592,-0.887 v1(-33.632,-0.847) ; v1(-33.441,8.99) -32.587,9.845 R5.1
  Bottom Layer w0.254: v1(-33.632,-0.847) -33.537,-0.752 -33.537,8.895 v1(-33.441,8.99)
NetR6_1: R6.1 SW2.2 U2.3 | length 22.3
  Top Layer w0.254: SW2.2 -40.732,10.125 -40.583,9.976 -37.711,9.976 -35.351,7.616 -35.351,5.22 -33.908,3.777 -33.908,2.609 -33.701,2.402 R6.1 -30.304,2.402 -29.811,1.909 -27.987,1.909 -27.353,2.543 -25.632,2.543 U2.3
NETWORK1: J3.P$60 P3.1 | length 4.2
  Top Layer w0.254: P3.1 22.528,21.939 23.946,20.521 J3.P$60
NETWORK2: C15.2 J3.P$53 L1.1 | length 16.9
  Top Layer w0.254: J3.P$53 30.946,20.854 31.657,21.565 33.047,21.565 ; 34.151,22.668 33.047,21.565 ; 34.151,22.669 C15.2 ; L1.1 39.486,17.624 35.545,21.565 33.047,21.565
NRESET_IN: C13.1 D5.1 J3.P$16 Q8.3 | length 36.2
  Top Layer w0.254: v1(-4.545,2.667) -4.591,2.621 -4.591,0.399 -2.278,0.399 C13.1 -2.208,-1.28 0.545,-4.033 D5.1 0.545,-6.532 -0.32,-7.397 -0.32,-9.262 -0.056,-9.526 Q8.3 ; v1(2.693,-0.115) 2.731,-0.153 6.248,-0.153 6.268,-0.174 7.614,-0.174 7.924,0.137 J3.P$16
  Bottom Layer w0.254: v1(-4.545,2.667) -4.406,2.528 1.706,2.528 2.693,1.541 v1(2.693,-0.115)
NRESET_OUT: Q8.1 R17.2 | length 4.1
  Top Layer w0.254: Q8.1 4.888,-10.476 5.635,-11.223 R17.2
POWER: Q5.1 R10.2 | length 3.3
  Top Layer w0.254: R10.2 -23.114,-19.695 -22.315,-18.896 Q5.1
PWRKEY_IN: C16.1 D4.1 Q9.3 | length 8.2
  Top Layer w0.254: Q9.3 -20.418,-26.595 -19.588,-25.765 -19.588,-25.355 -19.217,-24.984 -17.587,-24.984 C16.1 -17.484,-24.104 -18.101,-23.487 D4.1
PWRKEY_OUT: Q9.1 R22.2 | length 3
  Top Layer w0.254: R22.2 -26.234,-25.645 Q9.1
SIM_DET: J3.P$34 R19.1 | length 10.7
  Top Layer w0.254: J3.P$34 31.946,-5.723 31.96,-5.737 36.164,-5.737 39.643,-9.216 R19.1
TILT1: J1.01 R2.2 | length 3.7
  Top Layer w0.254: J1.01 1.899,20.944 2.357,20.486 2.357,18.926 R2.2
TILT2: J2.01 R3.2 | length 3.5
  Top Layer w0.254: R3.2 J2.01
TP11: J7.01 U2.5 | length 9.3
  Top Layer w0.254: J7.01 -28.726,-4.815 -27.538,-3.627 -27.538,-0.396 -27.141,0.001 U2.5
TP22: J6.01 U2.4 | length 6.6
  Top Layer w0.254: J6.01 -28.524,-0.606 -28.188,-0.27 -28.188,0.349 -27.266,1.271 U2.4
V+: J4.03 Q3.3 Q4.2 | length 25.1
  Top Layer w0.254: J4.03 -38.525,-2.111 -36.583,-2.111 -36.434,-2.26 -36.434,-2.518 -36.016,-2.936 v1(-36.016,-3.175) ; v1(-29.278,-14.498) -30.063,-15.283 Q4.2 -28.629,-15.941 -27.667,-16.903 Q3.3
  Bottom Layer w0.254: v1(-36.016,-3.175) -35.928,-3.263 -35.175,-3.263 -33.145,-5.293 -33.145,-6.511 -32.648,-7.008 -32.64,-7 -31.438,-7 -28.292,-10.146 -28.292,-13.512 v1(-29.278,-14.498)
VDD: Q1.2 R1.2 | length 3.8
  Top Layer w0.254: Q1.2 -9.908,15.126 -9.477,14.695 R1.2
pads on no net: D6.1 J3.P$1 J3.P$3 J3.P$4 J3.P$5 J3.P$6 J3.P$7 J3.P$8 J3.P$9 J3.P$10 J3.P$11 J3.P$12 J3.P$13 J3.P$14 J3.P$19 J3.P$20 J3.P$21 J3.P$22 J3.P$24 J3.P$26 J3.P$27 J3.P$28 J3.P$29 J3.P$35 J3.P$36 J3.P$40 J3.P$41 J3.P$42 J3.P$43 J3.P$44 J3.P$47 J3.P$48 J3.P$49 J3.P$50 J3.P$51 J3.P$52 J3.P$66 J3.P$67 J3.P$68 J4.04 J4.05 J10.C5 J10.C6 J10.G1 J10.G2 J10.G3 J10.G4 J10.G5 J10.G6 J10.X1 J10.X2 Q6.1 Q7.1 R7.1 R9.1 U2.6 U2.7 U2.8 U2.9 U2.10 U2.11 U2.12 U2.13 U2.14 U2.16 U2.17 U2.18 U2.19 U2.20 U2.21 U2.22 U2.23 U2.24 U2.25 U2.26 U2.27 U2.28 U2.29 U2.30 U2.31 U2.32 U2.34 U2.35 U2.36 U2.37 U4.1 U4.3 U4.4 U4.5 U4.6 U4.7 U4.8 U4.9 U4.12 U4.13 U4.14 U4.15 U4.16 U4.17 U4.18 U4.20

## Polygon pours and split planes (outlines as drawn)
no net on Bottom Layer "NONET_L-01_P-001" (solid, pour order 2): 234 vertices, not listed, extent -44.325,-30.2 45.192,27.583
GND on Top Layer "NONET_L-01_P-001" (solid, pour order 0): 234 vertices, not listed, extent -44.313,-30.151 45.205,27.632

## Keep-outs
Keep-Out Layer:
  the board outline again, w0.5

## Other copper
Top Layer:
  text "UCA" at 6.528,3.476 h5 r89.42
  text "Elec - 2023 - 2024 / Promotion 22" at 9.105,3.191 h1.2 r89.51
  text "22 Mars 2024" at 9.069,-28.005 h1
  text "Module Ruche - LoRa : V1" at 0.883,-29.456 h1.8

## Text inside footprints (layer, text, board x,y; h text height)
J3: Top Overlay "1" at 8.646,14.437 h1.27
U2: Mechanical 13 "ANTENNA" at -23.13,8.821 h1.78